# Altium PCB 4-20mA Transmitter-XTR117.PCBDOC
Units mil, origin at the board's own origin, x right, y up, seen from the top; angles counter-clockwise.
Board outline 1251.06 x 1014.77 mil, 2 copper layers (TopLayer, BottomLayer); 34 components, 25 nets, 102 pads, 22 vias.
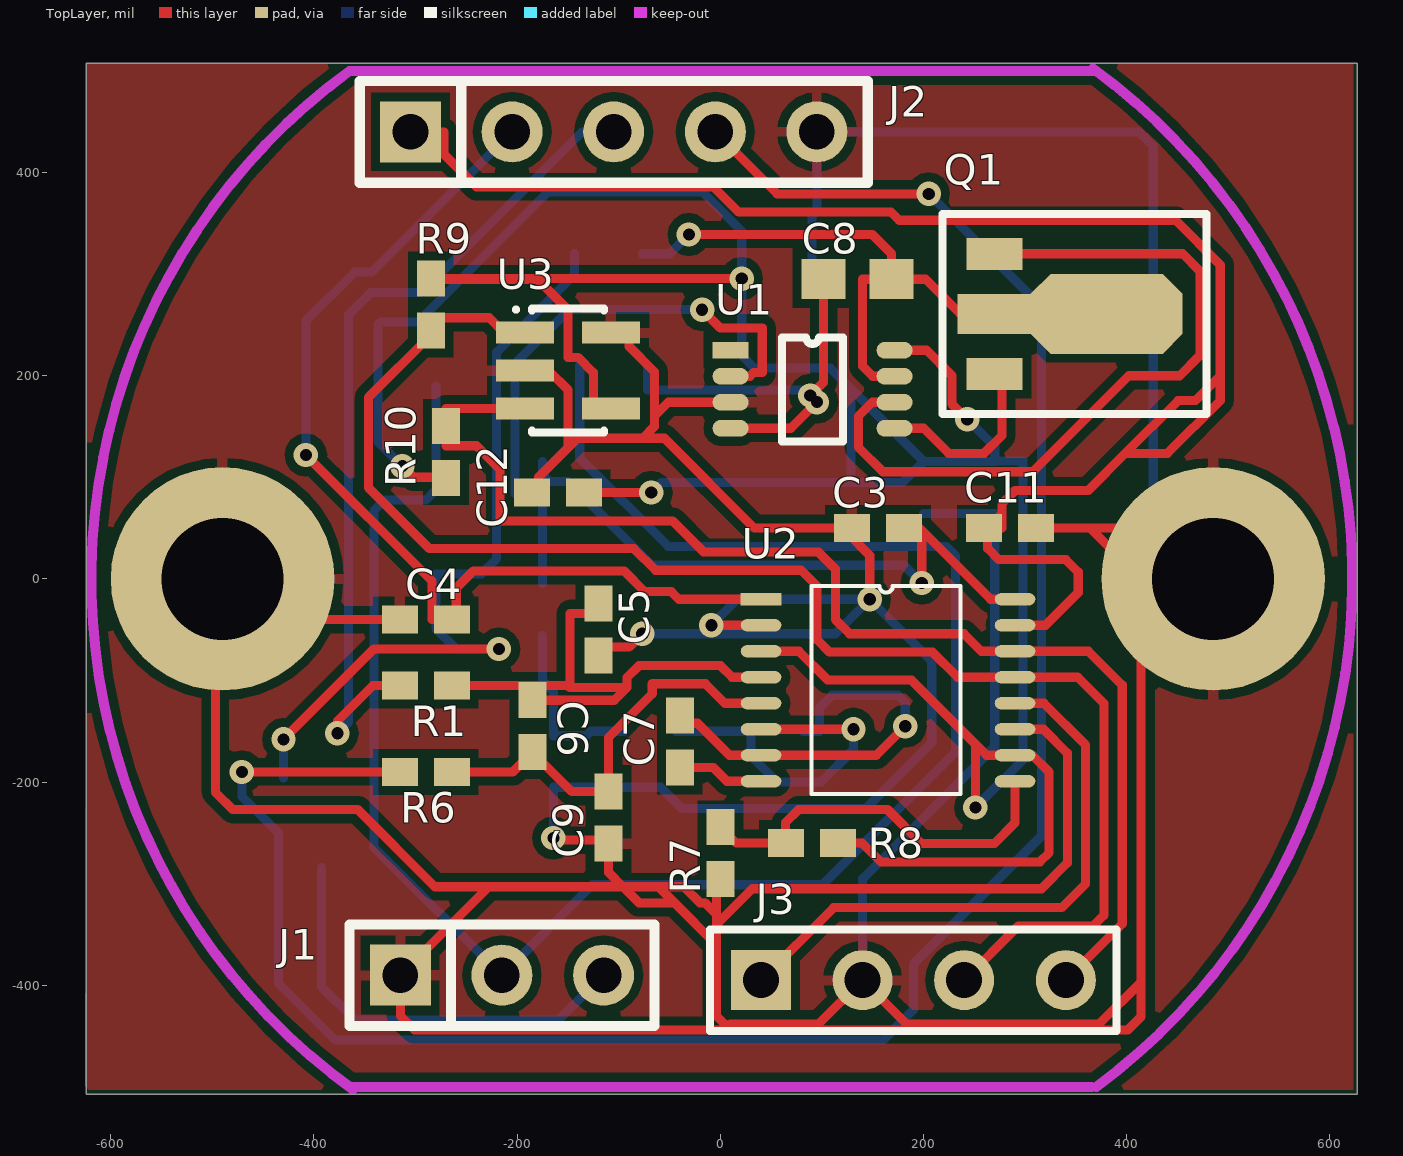
[diagram p0: TopLayer view]
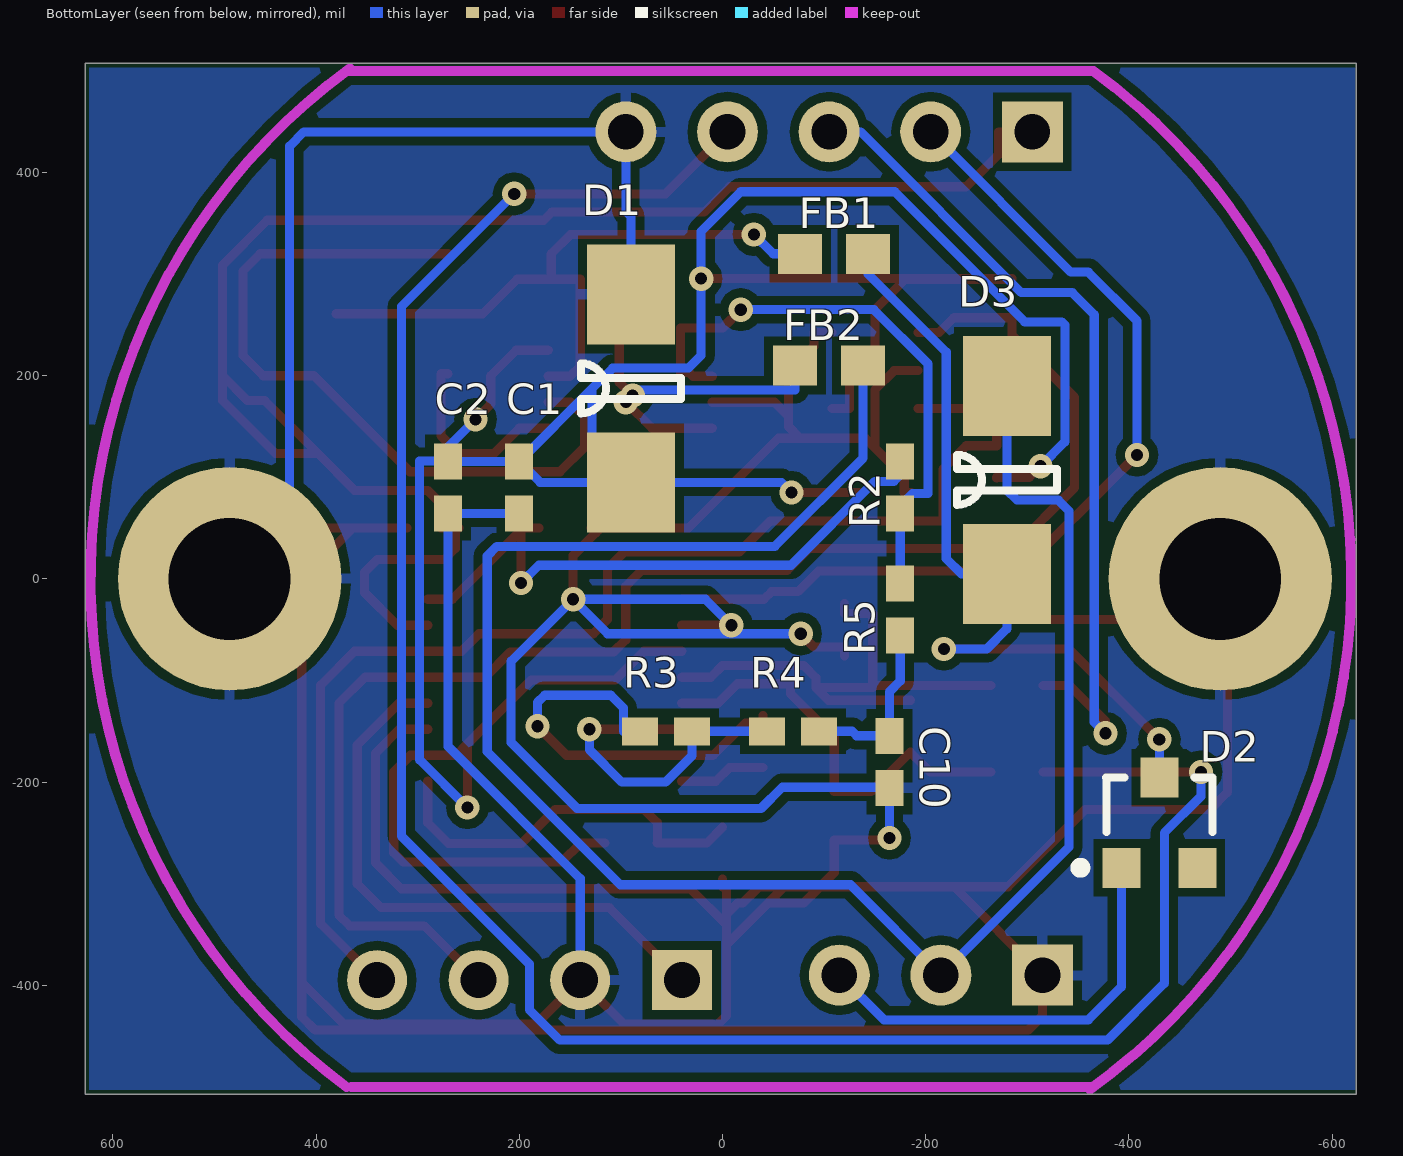
[diagram p1: BottomLayer view, seen from below]

## Layer stack, top to bottom
TopLayer: signal copper 1.4
Dielectric: dielectric 12.6, FR-4, Dk 4.8
BottomLayer: signal copper 1.4

## Board outline
-624.05,-507.38 627.01,-507.38 627.01,507.39 -624.05,507.39

## Design rules (kind name [scope] priority, off if disabled: settings)
Clearance [All] p1: gap=9
ComponentClearance [All] p1: gap=10 collisioncheckmode=0 verticalgap=10
HoleSize [All] p1: absolutevalues=TRUE maxlimit=220 minlimit=1 maxpercent=80.000 minpercent=20.000
PolygonConnect [All] p1: connectstyle=Relief reliefconductorwidth=10 reliefentries=4 polygonreliefangle="90 Angle"
RoomDefinition "4-20mA Transmitter-XTR117" [InComponentClass('4-20mA Transmitter-XTR117')] p1: confinementstyle=ConfineIn formatcopy=TRUE lockcomponents=FALSE outline -5000,-5000 -3000,-5000 -3000,-4000 -5000,-4000
RoutingVias [All] p1: holewidth=12 width=24 viastyle="Through Hole" minholewidth=12 minwidth=24 maxholewidth=28 maxwidth=40
SolderMaskExpansion [All] p1: expansion=4
TestPointUsage [All] p1: valid=0 allowmultiple=FALSE
Testpoint [All] p1: side=15 testpointundercomponent=TRUE minsize=40 maxsize=100 preferedsize=60 minholesize=20 maxholesize=40 preferedholesize=32 testpointgrid=1 style=1023 order=0123456789
Width [All] p1: maxlimit=30 minlimit=8 preferedwidth=9
16 further rules are at their usual default settings.

## Components (designator, comment, footprint, x,y, rotation, side; value= is the part's Value field where it differs from the comment)
C1 "Used in BOM report" CR1005-0402 200,90 r90 bottom
C2 "Used in BOM report" CR1005-0402 270,90 r90 bottom
C3 "Used in BOM report" CR1005-0402 155,50 r180 top
C4 "Used in BOM report" CR1005-0402 -290,-40 r0 top
C5 "Used in BOM report" CR1005-0402 -120,-50 r90 top
C6 "Used in BOM report" CR1005-0402 -185,-145 r270 top
C7 "Used in BOM report" CR1005-0402 -40,-160 r90 top
C8 "Used in BOM report" CR1608-0603 135,295 r180 top
C9 "Used in BOM report" CR1005-0402 -110,-235 r270 top
C10 "Used in BOM report" CR1005-0402 -164.41,-180 r270 bottom
C11 "Used in BOM report" CR1005-0402 285,50 r0 top
C12 "Used in BOM report" CR1005-0402 -160,85 r180 top
D1 "SMBJ5V0CA" SMB 90,95 r90 bottom
D2 "BAS70-TP" SOT23-3 -430,-240 r180 bottom
D3 "SMBJ40CA" SMB -280,5 r90 bottom
FB1 "Used in BOM report" CR1608-0603 -110,320 r180 bottom
FB2 "Used in BOM report" CR1608-0603 -105,210 r180 bottom
J1 "CON3" SIP3 -315,-390 r0 top locked
J2 "TSW-105-07-G-S" SIP5 -305,440 r0 top locked
J3 "1W & I2C Connector" HDR1X4 40,-394.96 r0 top
Q1 "FCX690BTA" SOT89 270,320 r270 top
R1 "Used in BOM report" CR1005-0402 -290,-105 r0 top
R2 "Used in BOM report" CR1005-0402 -175,90 r270 bottom
R3 "Used in BOM report" CR1005-0402 55.59,-150 r0 bottom
R4 "Used in BOM report" CR1005-0402 -69.41,-150 r0 bottom
R5 "Used in BOM report" CR1005-0402 -175,-30 r270 bottom
R6 "Used in BOM report" CR1005-0402 -290,-190 r0 top
R7 "Used in BOM report" CR1005-0402 0,-270 r90 top
R8 "Used in BOM report" CR1005-0402 90,-260 r180 top
R9 "Used in BOM report" CR1005-0402 -285,270 r90 top
R10 "Used in BOM report" CR1005-0402 -270,125 r270 top
U1 "XTR117" MSOP8 10,225 r0 top
U2 "PGA309" TSSOP16 40,-20 r0 top locked
U3 "24LC16BE" SOT23-5 -150,205 r270 top locked

## Footprints (in the part's own frame and the unit in brackets; to place one, negate y for a bottom-side part, rotate by r counter-clockwise, add the part's x,y. Pads: shape width x height; smd on the part's side, far side on the other; paste and mask are expansions set on the pad)
CR1005-0402 [mm] "Chip Resistor; Body 1.1 x 0.5 mm (LxW typ)"
  rect 0.9x0.7 smd: 1(-0.65,0) 2(0.65,0)
CR1608-0603 [mm] "Chip Resistor; Body 1.6 x 0.8 mm (LxW typ)"
  rect 1.1x1 smd: 1(-0.85,0) 2(0.85,0)
HDR1X4 [mm] "Connector; Header; 4 Position"
  rect 1.5x1.5 hole 0.9: 1(0,0)
  round 1.5 hole 0.9: 2(2.54,0) 3(5.08,0) 4(7.62,0)
  silkscreen extent -1.27,-1.27 8.89,1.27
MSOP8 [mm]
  rect 0.9x0.42 smd: 1(0,0)
  oval 0.9x0.42 smd: 2(0,-0.65) 3(0,-1.3) 4(0,-1.95) 5(4.1,-1.95) 6(4.1,-1.3) 7(4.1,-0.65) 8(4.1,0)
  silkscreen extent 1.28,-2.28 2.81,0.33
SIP3 [mil]
  rect 60x60 hole 35: 1(0,0)
  round 60 hole 35: 2(100,0) 3(200,0)
  silkscreen extent -50,-50 250,50
SIP5 [mil]
  rect 60x60 hole 35: 1(0,0)
  round 60 hole 35: 2(100,0) 3(200,0) 4(300,0) 5(400,0)
  silkscreen extent -50,-50 450,50
SMB [mm]
  rect 2.5x2.2 smd: 1(0,0) 2(4.7,0)
  silkscreen extent 1.73,-1.25 2.98,1.25
SOT23-3 [mm] "SOT-23; 3 Leads; Body 3.0 x 2.5 mm, inc. leads (LxW max)"
  rect 0.95x1 smd: 1(-0.95,-1.125) 2(0.95,-1.125) 3(0,1.125)
  silkscreen extent -2.1,-1.25 1.33,1.13
SOT23-5 [mm] "SOT-23/SC-74A; 5 Leads; Body 3 x 3 mm, inc. leads (LxW max)"
  rect 0.55x1.45 smd: 1(-0.95,-1.075) 2(0,-1.075) 3(0.95,-1.075) 4(0.95,1.075) 5(-0.95,1.075)
  silkscreen extent -1.57,-1.35 1.55,0.9
SOT89 [mm]
  rect 0.8x1.4 smd: 1(0,0) 3(3,0)
  oct 2x3.8 smd: 2(1.5,2.8)
  rect 1x1.854 smd: 2(1.5,0)
  silkscreen extent -1,-1.3 4,5.3
TSSOP16 [mil]
  rect 40x12 smd: 1(0,0)
  oval 40x12 smd: 2(0,-25.59) 3(0,-51.18) 4(0,-76.77) 5(0,-102.36) 6(0,-127.95) 7(0,-153.54) 8(0,-179.13) 9(250,-179.13) 10(250,-153.54) 11(250,-127.95) 12(250,-102.36) 13(250,-76.77) 14(250,-51.18) 15(250,-25.59) 16(250,0)
  silkscreen extent 50,-192 197,13

## Part data
C1 C2 C3 C4 C5 C6 C7 C8 C9 C10 C11 C12: library part Capacitor, "CAP, CERM, xxxF, xxV, [TempCo], xx%, [PackageReference]"
D1 D3: library part TVS_BI_SMB
D2: library part Component_1
FB1 FB2: library part Ferrite_Bead, "300mA Ferrite Bead, 600 ohm @ 100MHz"
J3: library part TSW-102-07-G-S, "Header, TH, 100mil, 2x1, Gold plated, 230 mil above insulator"
Q1: library part "FCX690BTA, Diodes Inc.", "Transistor, NPN, 45V, 1A, SOT-89"
R1 R2 R3 R4 R5 R6 R7 R8 R9 R10: library part Resistor, "RES, xxx ohm, x%, xW, [PackageReference]"
U1: library part XTR117_MSOP
U2: library part PGA309_TSSOP16
U3: library part 24LC16BE_SOT-23

## Free pads (board coordinates)
  round 220 hole 120: 1(-490,0) 1(485,0)

## Via types
v1: diameter 24, hole 12, TopLayer to BottomLayer, 22 vias

## Nets (pads, with @x,y where several pads share a name; then routed paths per layer and width w, separated by ;. In a path a pad name is that pad's centre, name@x,y a point inside that pad or via, vN(x,y) a via of type N, cw(c..) or ccw(c..) an arc to the next point about the centre after c; other vN are vias at no path point)
GND: C1.1 C2.1 C3.2 C4.1 C5.1 C9.2 C10.2 C11.2 C12.2 D1.2 J1.1 J2.5 J3.2 pad.1 R7.1 U1.3 U2.2 U2.11 U3.2 U3.5 | length 7423.5
  TopLayer w9: pad.1@-490,0 -453.5,-36.5 pad.1@-457,-40 ; C4.1 pad.1@-457,-40 ; U3.2 -169,205 -150,186 -150,129 ; C12.2 -179,85 -179,100 -150,129 ; v1(-164.41,-255) -162.41,-257 -110,-257 C9.2 -110,-289 -96,-303 ; C5.1 -120,-67 -90,-67 v1(-77,-54) ; U3.5 -90,242.4 -90,228.82 -65,203.82 -65,160 ; v1(-8.82,-45.59) U2.2 ; R7.1 0,-303 -4,-303 -4,-330 ; U1.3 -51.18,173.82 -65,160 ; C3.2 C3.2@120,50 ; v1(147,-20) 147,23 124.71,45.3 C3.2@120,50 ; U2.11 318,-147.95 341.5,-171.45 341.5,-279.5 316,-305 31.5,-305 -4,-340.5 ; C11.2 364,50 ; pad.1@485,0 435,50 364,50 ; pad.1@-457,-40 -497,-80 -497,-210 -480,-227 -357,-227 -281,-303 -228,-303 ; -228,-303 -96,-303 ; -228,-303 J1.1 -315,-430 -301,-444 10,-444 ; -150,129 -140.5,138.5 -76.5,138.5 ; -96,-303 -80,-319 -45,-319 ; -96,-303 -61,-303 ; -76.5,138.5 -65,150 -65,160 ; -76.5,138.5 -55,138.5 33.5,50 C3.2@120,50 ; -61,-303 -45,-319 ; -61,-303 -36,-303 -20,-319 -15,-319 -4,-330 ; -45,-319 -4,-360 ; -4,-360 -4,-340.5 ; -4,-360 -4,-430 10,-444 ; -4,-340.5 -4,-330 ; 10,-444 10,-438 96.96,-438 J3.2 183.04,-438 373,-438 414,-397 ; 10,-444 401,-444 414,-431 414,-397 ; 364,50 414,0 414,-397
  BottomLayer w9: v1(-164.41,-255) C10.2 -164.41,-205 -59,-205 -38,-226 143,-226 208,-161 208,-81 v1(147,-20) ; v1(-77,-54) -8.82,-54 113,-54 v1(147,-20) ; v1(-8.82,-45.59) 16.77,-20 v1(147,-20) ; D1.2 90,357 95,362 J2.5 412,440 426,426 426,0 pad.1@485,0 ; J3.2 140,-295 270,-165 C2.1 C1.1
NetC1_2: C1.2 C2.2 C12.1 D1.1 R8.1 R9.2 R10.2 U1.8 U2.3 U2.10 U3.4 | length 3315.1
  TopLayer w9: v1(-313,111) -302,100 -270,100 R10.2 ; C12.1 v1(-68,85) ; U3.4 -125,167.6 -125,203 -140,218 -150,218 -150,265 -180,295 -285,295 R9.2 v1(21,295.59) ; U2.3 77.23,-71.18 105.55,-99.5 188,-99.5 251,-162.5 ; R8.1 139.5,-260 158,-278.5 314.5,-278.5 323.5,-269.5 323.5,-190 307.04,-173.54 U2.10 262.04,-173.54 251,-162.5 ; U1.8 203,225 228,200 228,172 v1(243,157) ; v1(251,-225) 251,-162.5
  BottomLayer w9: v1(-313,111) -337,135 -337,250 -334,253 -297.54,253 -169.54,381 -18,381 21,342 v1(21,295.59) 21,220 33.5,207.5 108.09,207.5 128.5,187.09 ; v1(-68,85) -58,95 D1.1 D1.1@128.5,95 ; v1(243,157) 270,130 C2.2@270,116 ; v1(251,-225) 298,-178 298,116 C2.2@270,116 ; D1.1@128.5,95 128.5,187.09 ; D1.1@128.5,95 179.41,95 C1.2 ; 128.5,187.09 C1.2 ; C1.2 C2.2 C2.2@270,116
NetC3_1: C3.1 R2.1 U2.16 | length 620.7
  TopLayer w9: C3.1 196,50 C3.1@198.23,47.77 ; v1(198.23,-4) C3.1@198.23,47.77 ; U2.16 266,-20 C3.1@198.23,47.77
  BottomLayer w9: R2.1 -175,102.37 -168.63,96 -150,96 -67.5,13.5 180.73,13.5 v1(198.23,-4)
NetC4_2: C4.2 J2.2 U2.1 | length 998.9
  TopLayer w9: v1(-408,122) -284,-2 -284,-40 C4.2 -260,-40 -260,-9 -243.18,7.82 -94.6,7.82 -74.31,-12.46 -48.35,-12.46 -40.81,-20 U2.1
  BottomLayer w9: v1(-408,122) -408,254 -360,302 -343,302 J2.2
NetC5_2: C5.2 C6.1 R1.2 U2.4 | length 533.5
  TopLayer w9: R1.2 -185,-105 -150,-105 -148,-107 ; C6.1 -104.41,-119.41 -92,-107 ; C5.2 -120,-34 -148,-34 -148,-107 ; U2.4 11.58,-96.77 0,-85.19 -80,-85.19 -92,-97.19 -92,-107 ; -148,-107 -92,-107
NetC6_2: C6.2 C9.1 R6.2 U2.5 | length 417.5
  TopLayer w9: R6.2 -204.41,-190 C6.2 -146.18,-209.41 C9.1 -110,-156 -67,-113 -67,-103.19 -14.81,-103.19 4.36,-122.36 U2.5
NetC7_1: C7.1 U2.8 | length 85.6
  TopLayer w9: C7.1 -7,-185.59 6.54,-199.13 U2.8
NetC7_2: C7.2 R3.2 U2.7 | length 409.9
  TopLayer w9: C7.2 -40,-142 -22.54,-142 9,-173.54 U2.7 153.46,-173.54 v1(182,-145)
  BottomLayer w9: R3.2 97.5,-150 97.5,-126.95 110,-114.45 174.95,-114.45 182,-121.5 v1(182,-145)
NetC8_1: C8.1 FB1.1 Q1.2 U1.7 | length 661.2
  TopLayer w9: v1(-31,339) 149.46,339 168.46,320 C8.1 ; U1.7 150,199.41 140,209.41 140,295 C8.1 ; Q1.2@380.24,260.94 270,260.94 236.06,260.94 202,295 C8.1
  BottomLayer w9: FB1.1 -50,320 v1(-31,339)
NetC8_2: C8.2 FB2.1 U1.4 | length 411.1
  TopLayer w9: U1.4 69.23,148.23 v1(95,174) ; v1(88.46,180.54) 101.54,193.61 C8.2
  BottomLayer w9: FB2.1 -71.54,186 83,186 v1(88.46,180.54) v1(95,174)
NetC10_1: C10.1 R4.1 R5.2 | length 174.4
  BottomLayer w9: R5.2 -175,-100.41 -164.41,-111 C10.1 -132,-154.41 -127.59,-150 R4.1
NetC11_1: C11.1 J2.1 U2.15 | length 1655.9
  TopLayer w9: J2.1 -272,440 -272,418 -240,386 -7,386 18,361 168,361 176,353 448,353 492,309 492,200 ; C11.1 C11.1@263,50 ; U2.15 320,-45.59 352.26,-13.33 352.26,6.74 340,19 274,19 263,30 C11.1@263,50 ; C11.1@263,50 277,64 ; C11.1@263,50 277,50 277,64 ; 277,64 277,74 290,87 362,87 398.5,123.5 ; 398.5,123.5 440,123.5 492,175.5 492,200 ; 398.5,123.5 450.5,175.5 467.5,175.5 492,200
NetD2_1: D2.1 J1.3 | length 426.4
  BottomLayer w9: D2.1 -392.6,-401.4 -360,-434 -159,-434 J1.3
NetD2_3: D2.3 D3.1 FB1.2 | length 808.6
  TopLayer w9: v1(-430,-158) -341,-69 v1(-218,-69)
  BottomLayer w9: D2.3 v1(-430,-158) ; v1(-218,-69) -260,-69 -280,-49 D3.1 -235.28,5 -220.28,20 -220.28,223.18 -143.46,300 FB1.2
NetD3_2: D3.2 FB2.2 J1.2 | length 1912.3
  BottomLayer w9: D3.2 -280,87.5 -290,77.5 -330.5,77.5 -341,67 -341,-264 J1.2 -126,-301 100.5,-301 231.5,-170 231.5,22.5 222,32 -51.46,32 -138.46,119 FB2.2
NetJ2_3: J2.3 R1.1 | length 840
  TopLayer w9: v1(-377,-152) -377,-140 -342,-105 R1.1
  BottomLayer w9: v1(-377,-152) -366,-141 -366,260 -344.25,281.75 -294.25,281.75 -136,440 J2.3
NetJ2_4: J2.4 R6.1 | length 2175.4
  TopLayer w9: v1(-471,-190) R6.1 ; J2.4 56,379 v1(205,379)
  BottomLayer w9: v1(-471,-190) -471,-214 -435,-250 -435,-398 -379,-454 160,-454 190,-424 190,-379 316,-253 316,268 v1(205,379)
NetJ3_1: J3.1 U2.12 | length 581.9
  TopLayer w9: J3.1 111.47,-323.5 336,-323.5 359.5,-300 359.5,-163.5 318.36,-122.36 U2.12
NetJ3_3: J3.3 R9.1 U2.13 U3.1 | length 1506.6
  TopLayer w9: U3.1 -213,242.4 -227.6,257 -285,257 R9.1 -285,240 -346.5,178.5 -346.5,90 -286.34,29.84 -85.1,29.84 -63.76,8.5 79.5,8.5 95.23,-7.23 95.23,-60 107.18,-71.95 208.68,-71.95 233.5,-96.77 U2.13 351.77,-96.77 377.5,-122.5 377.5,-331.01 367.01,-341.5 293.47,-341.5 J3.3
NetJ3_4: J3.4 R10.1 U2.14 U3.3 | length 1249.8
  TopLayer w9: U3.3 -270,167.6 R10.1 -270,131 -240,131 -217,108 -217,57 -47,57 -16.5,26.5 96.5,26.5 113.23,9.77 113.23,-40 127.18,-53.95 239.63,-53.95 256.87,-71.18 U2.14 362.18,-71.18 395.5,-104.5 395.5,-339.46 J3.4
NetQ1_1: Q1.1 U1.6 | length 757.3
  TopLayer w9: U1.6 149.64,173.82 135.82,160 135.82,129.68 160,105.5 307.5,105.5 402,200 452,200 472,220 472,303 455,320 Q1.1
NetQ1_3: Q1.3 U1.5 | length 191
  TopLayer w9: U1.5 200,148.23 224.73,123.5 259.5,123.5 277,141 277,201.89 Q1.3
NetR2_2: R2.2 R5.1 U1.2 | length 586.1
  TopLayer w9: v1(-18,265) 0,247 41.22,247 41.22,203 32.59,203 29,199.41 U1.2
  BottomLayer w9: R5.1 R2.2 -175,72 -187,84 -202.28,84 -202.28,211.72 -149,265 v1(-18,265)
NetR3_1: R3.1 R4.2 U2.6 | length 333.9
  TopLayer w9: U2.6 v1(131,-147.95)
  BottomLayer w9: R4.2 R3.1 30,-174 56,-200 98.95,-200 131,-167.95 v1(131,-147.95)
NetR7_2: R7.2 R8.2 U2.9 | length 385.5
  TopLayer w9: R7.2 15.59,-260 R8.2@64,-260 ; R8.2 R8.2@64,-260 ; U2.9 290,-240 269.5,-260.5 198,-260.5 164.5,-227 77,-227 64,-240 R8.2@64,-260
pads on no net: D2.2 U1.1

## Polygon pours and split planes (outlines as drawn)
GND on TopLayer (solid): -623,507 623,507 623,-503 -625,-503
GND on BottomLayer (solid): -623,503 623,503 623,-503 -623,-503

## Keep-outs
KeepOutLayer:
  lines w10: -365,-500 365,-500 ; -361.71,-502.38 cw(c0,0) -365,500 370,500 ; 366.75,502.39 cw(c0,0) 370,-500